# Altium PCB PCB1.PcbDoc
Units mm, origin at the board's own origin, x right, y up, seen from the top; angles counter-clockwise.
Board outline 32.64 x 33.66 mm, 2 copper layers (Top Layer, Bottom Layer); 11 components, 7 nets, 23 pads, 0 vias.
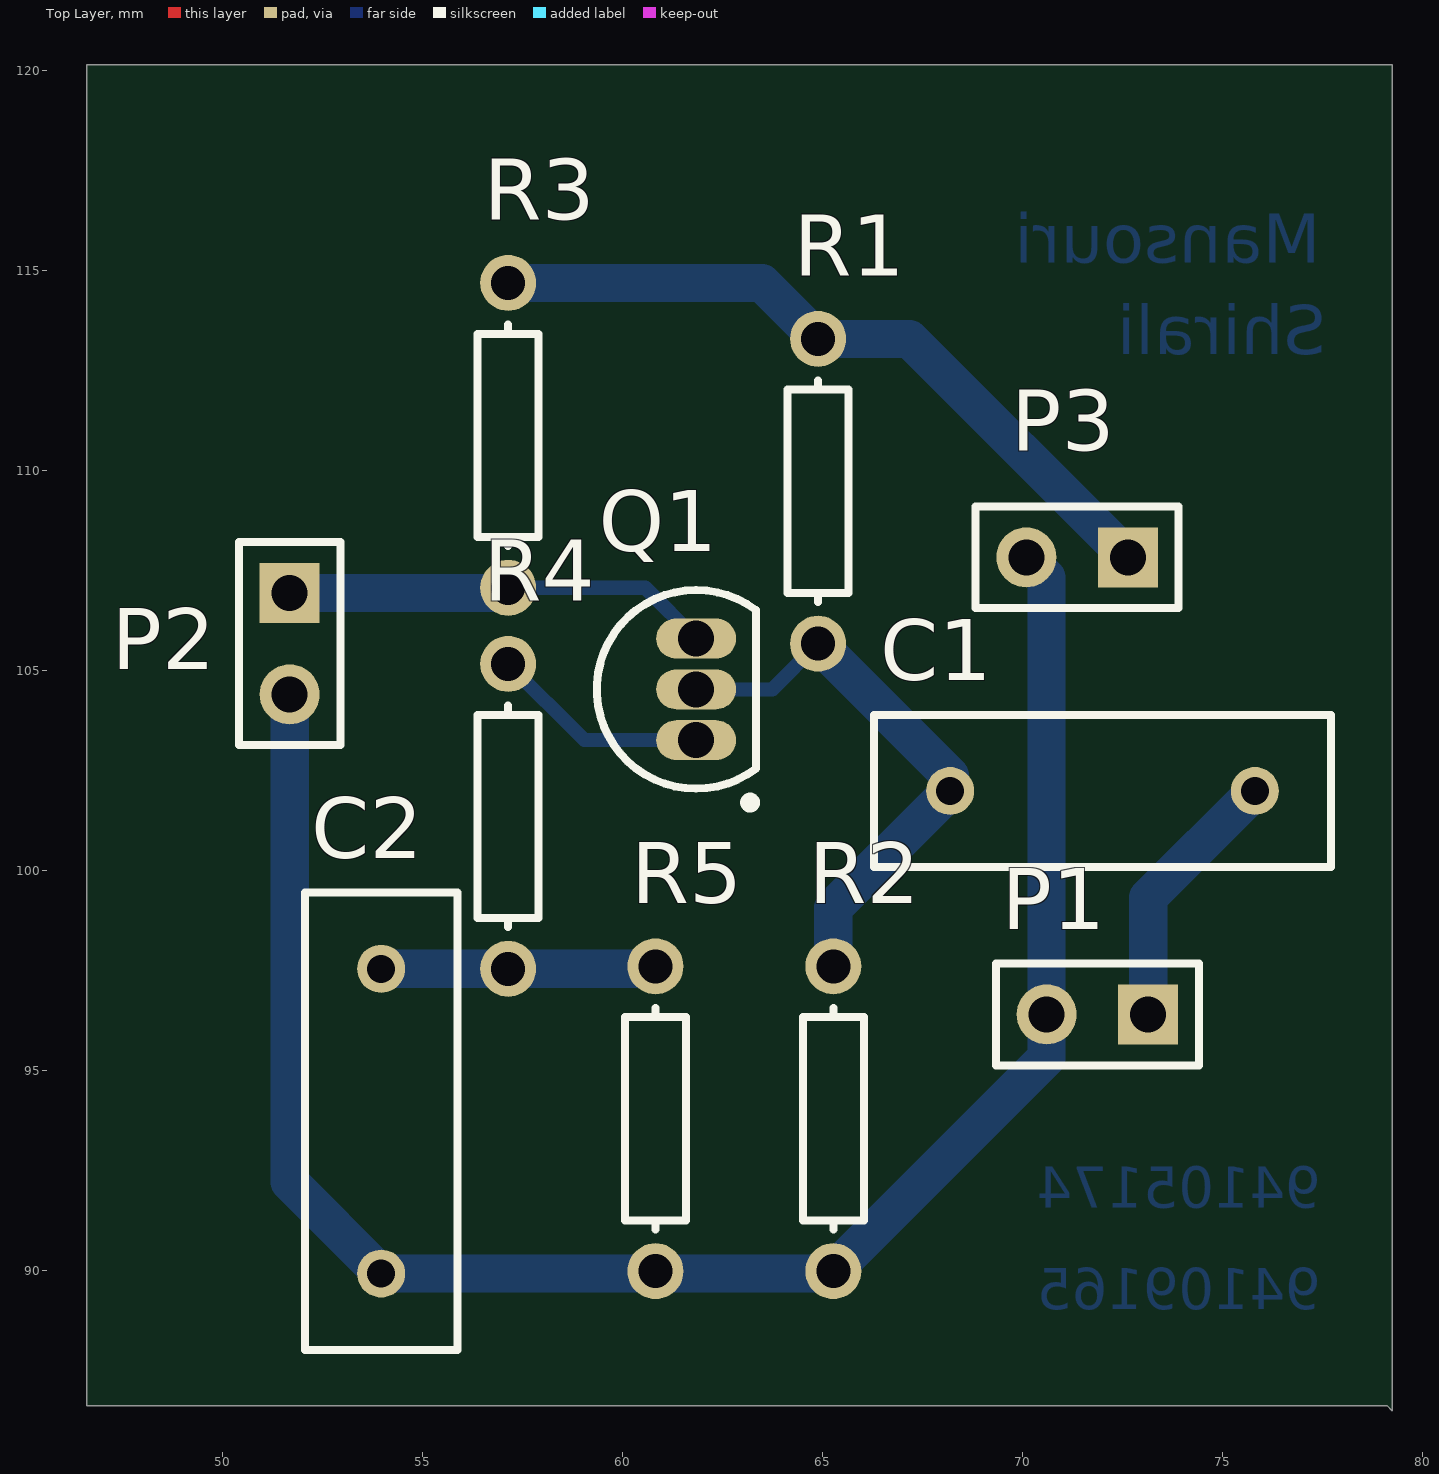
[diagram p0: Top Layer view]
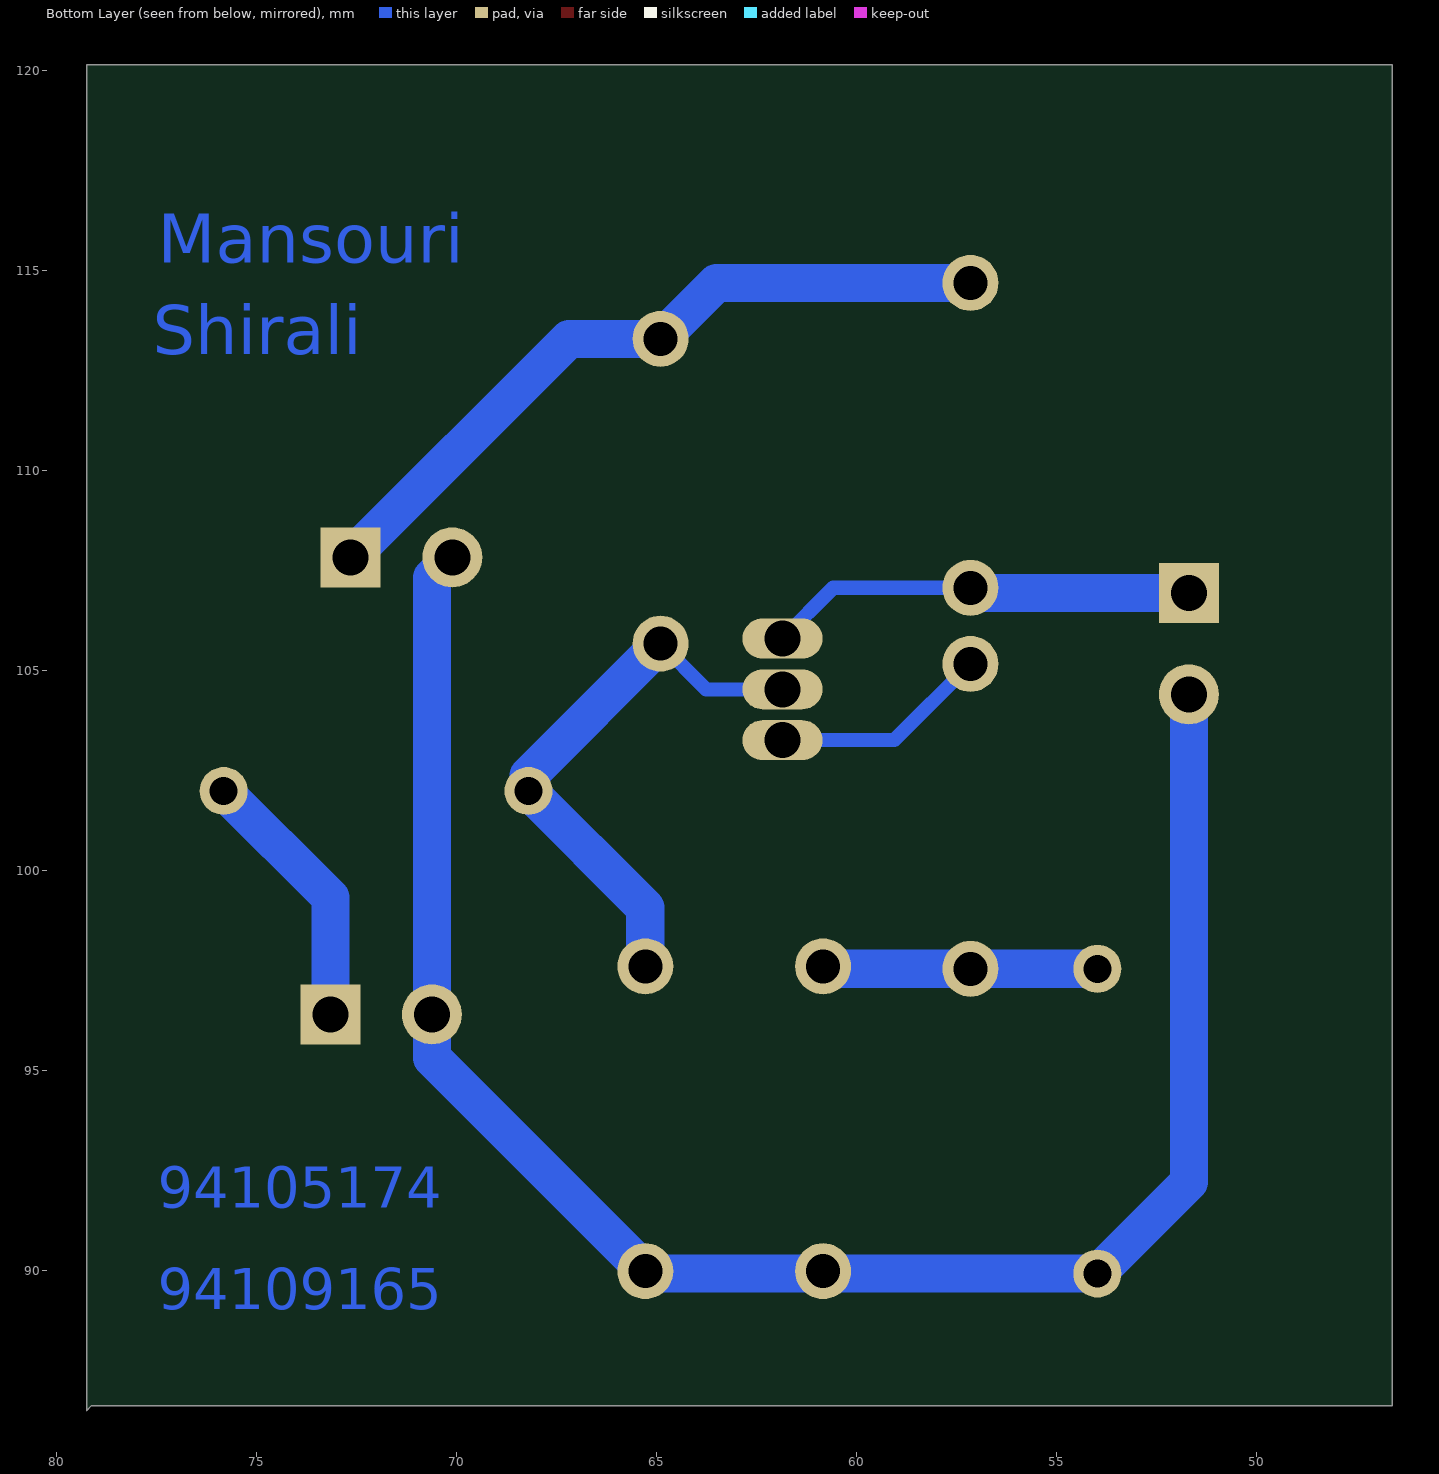
[diagram p1: Bottom Layer view, seen from below]

## Layer stack, top to bottom
Top Solder: solder mask 0.0102, Solder Resist, Dk 3.5
Top Layer: signal copper 0.0356
Dielectric 1: dielectric 0.32, FR-4, Dk 4.8
Bottom Layer: signal copper 0.0356
Bottom Solder: solder mask 0.0102, Solder Resist, Dk 3.5

## Board outline
46.609,120.142 79.248,120.142 79.248,86.487 79.121,86.614 46.609,86.614 46.609,120.142

## Design rules (kind name [scope] priority, off if disabled: settings)
Clearance [All] p1: gap=0.254
PolygonConnect [All] p1: connectstyle=Relief reliefconductorwidth=0.254 reliefentries=4 polygonreliefangle="90 Angle" airgapwidth=0.254
RoutingVias [All] p1: holewidth=0.711 width=1.27 viastyle="Through Hole" minholewidth=0.711 minwidth=1.27 maxholewidth=0.711 maxwidth=1.27
SolderMaskExpansion [All] p1: expansion=0.102
Width [All] p1: maxlimit=0.954 minlimit=0.354 preferedwidth=0.754
30 further rules are at their usual default settings.

## Components (designator, comment, footprint, x,y, rotation, side; value= is the part's Value field where it differs from the comment)
C1 "Cap" RAD-0.3 72.009,101.981 r180 top
C2 "Cap" RAD-0.3 53.975,93.726 r90 top
P1 "Header 2H" HDR1X2 73.152,96.393 r180 top
P2 "Header 2H" HDR1X2 51.689,106.934 r270 top
P3 "Header 2H" HDR1X2 72.644,107.823 r180 top
Q1 "2N3904" TO-92A 61.849,104.521 r0 top
R1 "Res1" AXIAL-0.3 64.897,109.474 r90 top
R2 "Res1" AXIAL-0.3 65.278,93.786 r90 top
R3 "Res1" AXIAL-0.3 57.15,110.871 r90 top
R4 "Res1" AXIAL-0.3 57.15,101.346 r90 top
R5 "Res1" AXIAL-0.3 60.833,93.786 r90 top

## Footprints (in the part's own frame and the unit in brackets; to place one, negate y for a bottom-side part, rotate by r counter-clockwise, add the part's x,y. Pads: shape width x height; smd on the part's side, far side on the other; paste and mask are expansions set on the pad)
AXIAL-0.3 [mm] "Axial Device, Thru-Hole; 2 Leads; 0.3 in Pin Spacing"
  round 1.4 hole 0.85: 1(-3.81,0) 2(3.81,0)
  silkscreen extent -2.77,-0.76 2.77,0.76
HDR1X2 [mm] "Connector; Header; 2 Position"
  rect 1.5x1.5 hole 0.9: 1(0,0)
  round 1.5 hole 0.9: 2(2.54,0)
  silkscreen extent -1.27,-1.27 3.81,1.27
RAD-0.3 [mm] "Radial Cap, Thru-Hole; 2 Leads; 0.3 in Pin Spacing"
  round 1.2 hole 0.7: 1(-3.81,0) 2(3.81,0)
  silkscreen extent -5.71,-1.91 5.71,1.91
TO-92A [mm] "TO, Flat Index; 3 In-Line, Axial Leads; Body Dia. 4.5mm; Leads 0.51 x 0.48 mm (max)"
  oval 2x1 hole 0.9: 1(0,-1.27) 2(0,0) 3(0,1.27)
  silkscreen extent -2.48,-2.95 1.5,2.48, body extent -2.48,-2.5 1.5,2.5, height 6.86

## Part data
C1 C2: "Capacitor"
P1 P2 P3: "Header, 2-Pin, Right Angle"
Q1: "NPN General Purpose Amplifier"
R1 R2 R3 R4 R5: "Resistor"

## Nets (pads, with @x,y where several pads share a name; then routed paths per layer and width w, separated by ;. In a path a pad name is that pad's centre, name@x,y a point inside that pad or via, vN(x,y) a via of type N, cw(c..) or ccw(c..) an arc to the next point about the centre after c; other vN are vias at no path point)
GND: C2.1 P1.2 P2.2 P3.2 R2.1 R5.1 | length 47
  Top Layer w0.954: R2.1@65.218,89.916 R2.1
  Bottom Layer w0.954: P2.2 51.689,92.202 C2.1 R2.1@65.218,89.916 ; R2.1 70.612,95.31 P1.2 70.612,107.315 P3.2
NetC1_1: C1.1 P1.1 | length 6.7
  Bottom Layer w0.954: P1.1 73.152,99.314 C1.1
NetC1_2: C1.2 Q1.2 R1.1 R2.2 | length 14.2
  Bottom Layer w0.354: Q1.2 63.754,104.521 R1.1
  Bottom Layer w0.954: R1.1 68.199,102.362 C1.2 65.278,99.06 R2.2
NetC2_2: C2.2 R4.1 R5.2 | length 6.8
  Bottom Layer w0.954: C2.2 R4.1 R5.2@60.773,97.536
NetP2_1: P2.1 Q1.3 R3.1 | length 10.6
  Bottom Layer w0.354: R3.1 60.579,107.061 Q1.3
  Bottom Layer w0.954: P2.1 R3.1@57.023,106.934
NetQ1_1: Q1.1 R4.2 | length 5.5
  Bottom Layer w0.354: R4.2 59.055,103.251 Q1.1
VCC: P3.1 R1.2 R3.2 | length 18.3
  Bottom Layer w0.954: R3.2 63.5,114.681 R1.2 67.183,113.284 P3.1

## Other copper
Bottom Layer:
  text "Mansouri" at 77.47,115.189 h1.22
  text "Shirali" at 77.597,112.903 h1.22
  text "94105174" at 77.47,91.567 h1.02
  text "94109165" at 77.47,89.027 h1.02

## Silkscreen, mask and mechanical layers (free items; w line width, h text height)
Mechanical 1:
  lines w0.954: 49.276,87.376 78.486,87.376 78.486,117.475 49.276,117.475 49.276,87.376